# EAGLE board test (EAGLE 9.5.2)

No outline drawn. Coordinates in mm, seen from the top.
Copper layers (1*16): Top 0.035mm / dielectric 1.5mm / Bottom 0.035mm
Design rules "default": minimum track width 6mil, minimum drill 0.35mm, track to track 6mil, track to pad 6mil, pad to pad 6mil, via to via 6mil, smd to smd 6mil, copper to edge 40mil, drill to drill 6mil, minimum pad ring 10mil, minimum via ring 8mil, stop-mask expansion 4mil, vias tented up to drill 0mil, thermal gap 10mil

## Footprints (pad centres in the part's own frame; a part is rotated, then mirrored left to right if it is on the bottom)
DIL16 = drill 0.813 long: 1 -8.89,-3.81; 2 -6.35,-3.81; 3 -3.81,-3.81; 4 -1.27,-3.81; 5 1.27,-3.81; 6 3.81,-3.81; 7 6.35,-3.81; 8 8.89,-3.81; 9 8.89,3.81; 10 6.35,3.81; 11 3.81,3.81; 12 1.27,3.81; 13 -1.27,3.81; 14 -3.81,3.81; 15 -6.35,3.81; 16 -8.89,3.81
B/C17S = drill 1.321 pad 2.54 octagon: 1 -5.004,0; 2 5.004,0

## Placement (x,y rotation side)
IC1  4018N  [DIL16]  15.24,11.43 0 top
IC2  4018N  [DIL16]  40.64,22.86 90 top
SG1  B/C17S  [B/C17S]  16.51,25.4 0 top
SG2  B/C17S  [B/C17S]  33.02,40.64 180 top
SG3  B/C17S  [B/C17S]  11.43,41.91 90 top

## Library data of the parts
IC1 IC2 = 40xx
SG1-SG3 = buzzer; OC_FARNELL: unknown; OC_NEWARK: unknown

## Nets
VDD: IC1.16 IC2.16
VSS: IC1.8 IC2.8

## Tracks (layer width: path | path; a pad name or v marks a point on that pad's centre or on a via)
VDD  (1 unrouted)
VSS  (1 unrouted)